# Altium PCB POWER_PCB_v2.PcbDoc (part 2 of 2)
Units mm, origin at the board's own origin, x right, y up, seen from the top; angles counter-clockwise.
Board outline 44.96 x 8.26 mm, 4 copper layers (Top Layer, Layer 1, Layer 2, Bottom Layer), stack 0.797 mm thick; 88 components, 59 nets, 290 pads, 126 vias.
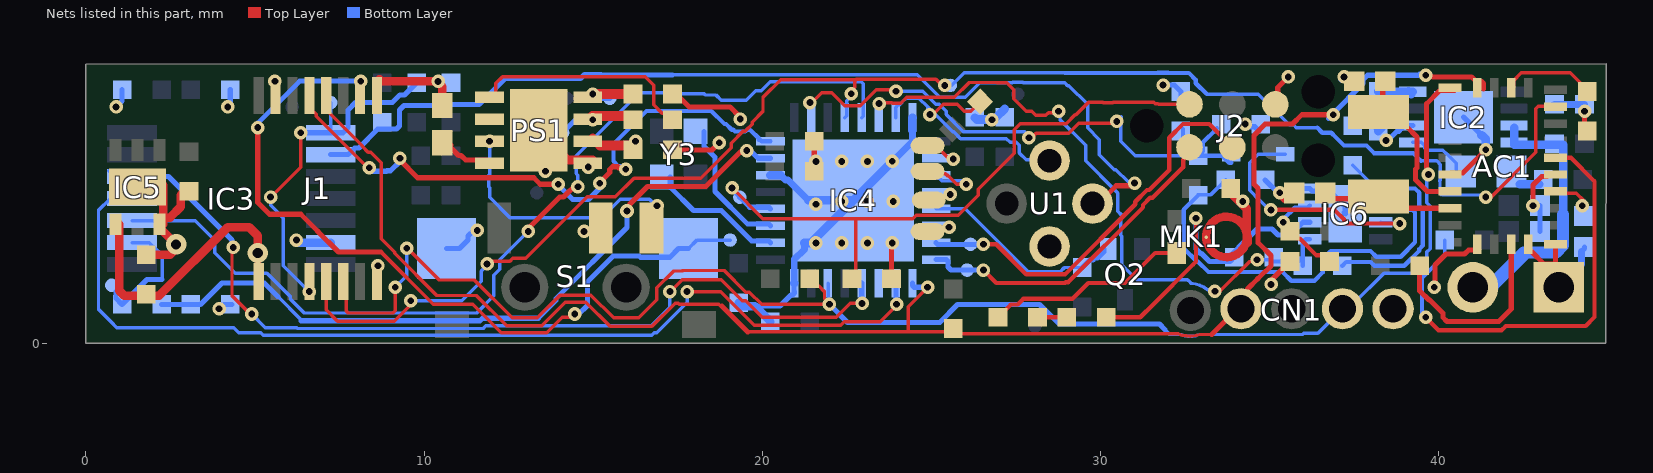
[diagram p4: the nets of this part, all layers, seen from the top]

## Via types
v1: diameter 0.4, hole 0.2, Top Layer to Bottom Layer, tented both sides, 123 vias
v2: diameter 0.6, hole 0.3, Top Layer to Bottom Layer, tented both sides, 2 vias
v3: diameter 0.35, hole 0.35, Top Layer to Bottom Layer, 1 vias

## Nets (pads, with @x,y where several pads share a name; then routed paths per layer and width w, separated by ;. In a path a pad name is that pad's centre, name@x,y a point inside that pad or via, vN(x,y) a via of type N, cw(c..) or ccw(c..) an arc to the next point about the centre after c; other vN are vias at no path point) (continued)
GND: AC1.2 AC1.5 AC1.6 AC1.10 AC1.25 C1.2 C2.2 C3.2 C6.2 C7.2 C9.1 C10.2 C12.1 C13.2 C14.2 C16.2 C17.2 C18.2 C19.2 C20.2 C21.1 C22.2 C23.2 C24.1 C25.1 C26.2 C27.2 C30.2 CN1.5 D1.2 IC2.6 IC2.9 IC3.6 IC4.6 IC4.16 IC4.32 IC4.33 IC5.3 IC5.7 IC6.4 IC6.9 J1.1 J1.2 J2.6 MK1.3 P1.1 PS1.5 PS1.9 R3.1 R5.1 R10.2 R13.1 R15.1 R19.2 R22.2 R23.2 S1.2 U1.1 | length 57
  Top Layer w0.152: J1.2@8.608,1.822 8.608,2.258 v1(8.636,2.286) ; C2.2@17.348,5.715 18.517,5.715 v1(18.729,5.927) v1@18.729,6.068 ; C1.2@17.348,7.366 17.459,7.366 17.838,6.987 19.048,6.987 19.348,6.687 v1(19.348,6.624) ; C25.1@21.539,5.969 21.539,5.464 21.59,5.413 v1(21.59,5.374) ; C22.2@23.825,1.905 23.825,2.944 v1(23.844,2.963) ; v1@35.08,1.763 35.08,1.882 R22.2@35.611,2.413 ; J2.6@35.179,7.059 35.249,7.129 35.249,7.563 v1(35.56,7.874) ; v1(35.306,4.445) 35.306,4.366 35.451,4.221 35.521,4.221 35.735,4.435 C19.2@35.735,4.445 ; v1(37.211,7.874) 37.386,7.874 C20.2@37.513,7.747 ; v1(39.878,1.651) 39.899,1.672 39.899,2.307 40.224,2.632 40.776,2.632 40.896,2.752 41.107,2.752 41.156,2.801 AC1.2@41.156,2.923 ; AC1.25@40.344,4.986 40.393,5.035 40.722,5.035 v1(41.402,5.715) ; AC1.5@42.656,2.923 42.656,2.76 42.705,2.712 42.754,2.712 43.133,2.333 43.469,2.333 AC1.6@43.469,2.923 ; v1(42.799,4.064) 42.799,4.673 43.055,4.929 43.208,4.929 43.208,4.937 43.257,4.986 AC1.10@43.469,4.986 ; v1(44.323,6.858) 44.323,6.35 R10.2@44.399,6.274
  Top Layer w0.254: IC5.7@1.636,4.615 1.771,4.75 2.21,4.75 2.286,4.674 IC5.3@2.286,3.665 ; C3.2@1.778,2.616 2.489,2.616 2.667,2.794 v2(2.667,2.921) 2.271,3.317 2.222,3.317 IC5.3@2.222,3.515 ; IC5.3@2.286,3.515 IC5.3@2.286,3.665 ; C14.2@2.921,4.496 2.803,4.378 2.803,4.032 2.484,3.713 2.334,3.713 IC5.3@2.286,3.665 ; J1.1@8.608,7.322 8.608,7.722 8.682,7.796 8.685,7.796 8.734,7.747 10.414,7.747 10.414,7.711 10.541,7.584 R3.1@10.541,7.027 ; PS1.9@13.536,6.391 PS1.9@13.536,6.139 ; v1(13.589,5.08) 13.536,5.133 PS1.9@13.536,6.139 ; PS1.5@14.838,5.319 14.859,5.298 v1(14.859,5.207) ; PS1.5@14.986,5.416 14.259,5.416 PS1.9@13.536,6.139 ; C27.2@33.858,4.445 v1@34.164,4.139 ; v1(34.216,4.191) v1@34.164,4.139 ; 34.354,3.151 34.333,3.171 34.333,3.97 v1@34.164,4.139 ; 34.355,2.966 34.355,3.151 ; v1(35.052,1.735) v1@35.08,1.763
  Bottom Layer w0.152: v1(0.889,6.985) 1.067,7.163 C10.2@1.067,7.493 ; v1(3.937,1.016) 4.064,1.143 C13.2@4.267,1.143 C13.2@4.318,1.143 ; v1(4.191,6.985) 4.267,7.061 C9.1@4.267,7.493 ; D1.2@10.668,2.794 11.049,2.794 11.303,3.048 11.303,3.167 11.467,3.331 v1(11.576,3.331) ; 19.785,1.094 20.525,1.094 20.851,1.42 20.897,1.42 20.955,1.478 20.955,1.524 20.946,1.533 IC4.32@20.946,1.769 ; v1(31.857,7.633) 32.186,7.633 32.385,7.434 C30.2@32.385,7.318 ; v1@34.41,6.398 34.573,6.398 R19.2@34.62,6.35 ; R23.2@34.874,4.826 35.255,4.445 v1(35.306,4.445) 35.433,4.445 35.56,4.572 IC6.4@36.195,4.572 36.269,4.498 36.569,4.498 36.606,4.461 36.821,4.461 37.245,4.038 IC6.9@37.245,3.822 IC6.9@37.211,3.856 ; v1@37.125,7.788 v1(37.211,7.874) ; R15.1@37.465,6.426 38.075,6.426 R5.1@38.227,6.274 ; v1(38.453,5.993) 38.482,6.021 38.53,6.021 38.665,6.156 38.665,6.158 38.769,6.262 38.83,6.262 38.919,6.351 38.919,6.36 38.993,6.434 IC2.6@39.243,6.434 ; IC2.9@40.743,6.684 IC2.9@41.275,6.152 ; C17.2@43.005,3.302 C16.2@43.005,4.064 ; P1.1@43.561,1.651 P1.1@44.235,2.325 ; C18.2@44.235,2.706 44.323,2.794 C18.2@44.323,2.842 ; v1(44.323,6.858) C6.2@44.323,7.061
  Bottom Layer w0.203: IC4.6@20.542,4.969 20.688,4.823 20.766,4.823 IC4.33@21.369,4.219 ; IC4.32@20.948,1.771 20.948,2.471 21.249,2.772 IC4.33@21.249,2.961 ; IC4.33@23.848,5.371 24.442,5.965 IC4.16@24.442,6.294 ; C7.2@43.434,7.061 C6.2@44.323,7.061 ; P1.1@44.235,2.325 C18.2@44.235,2.706
  Bottom Layer w0.254: v1(6.223,3.048) 6.298,2.973 IC3.6@7.239,2.973 ; v1@14.853,5.135 14.859,5.14 v1(14.859,5.207) ; C21.1@19.304,1.194 19.404,1.094 19.785,1.094 R13.1@20.244,0.635 ; IC4.6@20.246,4.969 IC4.6@20.542,4.969 ; IC4.32@20.946,1.769 IC4.32@20.948,1.771 ; IC4.33@21.249,2.961 v1(21.59,2.961) ; IC4.33@21.369,4.219 21.59,4.219 22.352,4.219 IC4.33@22.696,4.219 ; IC4.33@21.514,3.037 IC4.33@22.696,4.219 ; IC4.33@23.848,5.371 IC4.33@22.696,4.219 ; IC4.16@24.442,6.294 24.444,6.297 24.444,6.667 IC4.16@24.446,6.669 ; C23.2@26.289,6.669 26.345,6.613 26.788,6.613 v1(26.797,6.604) ; v1@26.797,6.669 26.913,6.669 C24.1@27.178,6.934 ; R5.1@38.227,6.274 R5.1@38.319,6.366 ; IC2.9@41.275,6.152 41.286,6.152 41.402,6.036 v1(41.402,5.715)
  other v1: 22.352,2.961 23.114,2.961 14.732,3.302 21.59,4.104 22.352,4.191 23.114,4.191 23.876,4.191 22.352,5.374 23.114,5.374 23.844,5.376 34.29,6.477 10.414,7.738
I2C1_SCL: AC1.19 CN1.2 IC4.25 J1.7 R11.1 | length 48.5
  Top Layer w0.102: J1.7@7.108,7.322 7.108,6.906 8.172,5.842 8.172,5.817 8.341,5.649 8.42,5.649 8.731,5.338 8.731,5.237 8.731,3.08 9.128,2.683 9.128,2.653 10.373,1.408 11.548,1.408 12.443,0.513 13.477,0.513 14.176,1.213 14.78,1.213 15.499,0.494 16.741,0.494 17.431,1.183 17.515,1.183 17.544,1.154 18.712,1.154 18.771,1.095 18.807,1.095 ; 19.572,0.33 24.32,0.33 ; v1(24.892,1.651) 24.32,1.079 24.32,0.33 ; 33.298,0.254 32.934,0.254 cw(c32.663,0.966) 32.663,0.204 cw(c32.663,1.21) 32.305,0.27 25.816,0.27 R11.1@25.654,0.432 25.552,0.33 24.32,0.33
  Top Layer w0.152: 18.807,1.095 19.572,0.33 ; 33.298,0.254 CN1.2@34.187,1.143 ; 34.355,1.6 34.66,1.905 34.868,2.113 34.879,2.113 35.049,2.282 35.049,2.588 34.67,2.966 34.67,4.573 34.544,4.699 34.544,6.14 34.881,6.477 35.687,6.477 35.962,6.752 v1(36.888,6.752) ; v1(39.624,7.921) 39.624,7.934 39.691,8.001 39.822,7.87 40.985,7.87 41.095,7.76 41.107,7.76 41.124,7.744 41.124,7.731 41.286,7.731 41.335,7.682 41.335,7.52
  Bottom Layer w0.152: IC4.25@24.446,1.769 24.446,1.7 24.495,1.651 v1(24.892,1.651) ; v1@36.751,6.652 36.87,6.771 37.774,7.675 37.774,7.791 37.905,7.921 39.411,7.921 39.443,7.954 39.592,7.954 v1(39.624,7.921)
I2C1_SDA: AC1.20 CN1.4 IC4.30 J1.6 R12.1 | length 46.1
  Top Layer w0.102: J1.6@7.608,1.822 7.699,1.731 7.699,0.949 7.759,0.889 9.072,0.889 9.143,0.961 v1(9.144,1.651) ; v1@9.491,2.755 9.544,2.755 9.62,2.679 9.64,2.679 10.454,1.865 11.486,1.865 12.604,0.748 13.352,0.748 14.02,1.416 14.936,1.416 15.604,0.748 16.352,0.748 16.881,1.277 16.881,1.633 17.38,2.131 17.636,2.131 17.653,2.148 18.872,2.148 19.518,1.502 19.623,1.502 19.982,1.143 21.989,1.143 v1(21.991,1.145) 21.991,1.177 21.844,1.324 21.844,1.524 21.687,1.681 21.636,1.681 R12.1@21.412,1.905
  Top Layer w0.152: 39.654,5.199 39.654,7.082 40.044,7.471 AC1.20@40.474,7.471
  Bottom Layer w0.102: v1(9.144,1.651) 9.491,1.998 v1(9.491,2.806) ; IC4.30@21.946,1.769 21.959,1.757 21.959,1.178 v1(21.991,1.145) v1@22.02,1.116 ; 31.917,0.396 32.059,0.254 32.392,0.254 ccw(c32.663,0.966) 32.934,0.254 34.884,0.254 35.347,0.254 ; 35.347,0.254 35.979,0.254 36.017,0.292 36.439,0.292 CN1.4@37.163,1.016 ; CN1.4@37.187,1.143 37.465,1.143 38.392,2.07 39.281,2.07 39.654,2.443 39.654,2.695 39.755,2.796 39.755,4.047 39.654,4.148 39.654,4.936 v1(39.705,4.986)
  Bottom Layer w0.152: v1@22.02,1.116 22.524,0.612 25.25,0.612 25.781,1.143 28.205,1.143 28.785,0.563 31.75,0.563 31.917,0.396 ; CN1.4@37.187,1.016 CN1.4@37.187,1.143
IMU_CLK_IN: AC1.27 C19.1 Y2.1 | length 4
  Top Layer w0.102: Y2.1@38.156,4.267 Y2.1@38.227,4.338
  Top Layer w0.152: C19.1@36.663,4.267 Y2.1@38.156,4.267 ; Y2.1@38.227,4.338 38.579,3.986 AC1.27@40.344,3.986 ; Y2.1@38.608,4.23 Y2.1@38.702,4.23
IMU_CLK_OUT: AC1.26 C20.1 Y2.2 | length 4.8
  Top Layer w0.152: C20.1@38.433,7.747 38.433,7.737 38.321,7.625 38.354,7.592 38.354,6.965 Y2.2@38.227,6.838 38.651,6.414 39.052,6.414 39.37,6.096 39.37,5.186 39.327,5.143 39.327,4.83 39.671,4.486 AC1.26@40.242,4.486
IMU_INT: AC1.14 IC4.12 J1.8 TP10.1 | length 46.5
  Top Layer w0.102: J1.8@7.108,1.822 7.108,0.982 7.44,0.65 9.12,0.65 v1@9.66,1.19 ; v1@11.84,2.42 12.542,2.42 12.625,2.503 13.003,2.503 14.83,4.33 15.66,4.33 16.21,4.88 18.18,4.88 19.082,5.782 19.082,5.912 19.442,6.272 19.494,6.272 19.701,6.478 19.701,6.531 20.024,6.854 20.024,7.267 20.552,7.795 22.733,7.795 22.781,7.795 ; v1(22.635,7.373) 22.665,7.403 22.685,7.403 22.725,7.444 22.725,7.554 22.733,7.562 22.733,7.747 22.781,7.795 ; v1(25.4,7.62) 25.319,7.62 25.141,7.798 22.784,7.798 22.781,7.795 ; v1(41.402,4.318) 41.558,4.318 42.878,5.638 42.878,6.929 42.954,7.006 43.301,7.006 43.395,6.912 AC1.14@43.469,6.986
  Bottom Layer w0.102: v1(9.604,1.251) 11.116,1.251 11.695,1.831 11.695,2.132 11.864,2.301 v1(11.864,2.341) ; IC4.12@22.446,6.669 22.506,6.729 22.506,7.171 22.635,7.299 v1(22.635,7.373) ; TP10.1@25.605,7.62 25.975,7.99 28.959,7.99 ; 33.147,7.366 34.671,7.366 35.585,6.452 35.722,6.452 35.8,6.374 36.418,6.374 ; 39.487,5.39 39.949,5.39 40.057,5.282 40.057,4.819 40.035,4.797 40.049,4.782 40.049,4.439 40.108,4.38 41.526,4.38 41.464,4.318 v1(41.402,4.318)
  Bottom Layer w0.127: 28.959,7.99 31.698,7.99 31.706,7.998 32.008,7.998 32.016,7.99 32.621,7.99 32.825,7.786 32.825,7.688 33.147,7.366 ; 36.418,6.374 36.568,6.223 36.83,6.223 36.973,6.08 ; 36.973,6.08 37.211,5.842 37.875,5.842 38.098,5.619 39.257,5.619 39.487,5.39
LH_DIODE_ARRAY: D1.1 J1.3 TP6.1 | length 23.1
  Top Layer w0.102: v1@5.082,6.273 v1(5.082,6.374) ; 6.856,3.304 6.856,3.31 ; 8.727,2.695 10.267,1.154 11.443,1.154 12.287,0.31 13.633,0.31 14.085,0.762 14.319,0.762 14.418,0.86 v1(14.457,0.86)
  Top Layer w0.152: v1@5.082,6.273 5.082,4.161 5.431,3.812 6.353,3.812 6.856,3.31 ; 6.856,3.304 7.465,2.695 8.727,2.695
  Bottom Layer w0.102: D1.1@17.818,2.794 18.072,3.048 TP6.1@19.05,3.048
  Bottom Layer w0.152: v1(5.082,6.374) 5.082,6.501 5.08,6.503 6.324,7.747 v1(8.128,7.747) ; v1(14.457,0.86) 14.576,0.86 14.83,1.114 14.83,1.817 15.593,2.58 16.363,2.58 16.402,2.54 17.272,2.54 17.526,2.794 D1.1@17.818,2.794
MIC_EN: IC4.21 Q2.1 R8.2 | length 6.1
  Bottom Layer w0.102: IC4.21@25.146,3.969 26.003,3.969 27.867,2.105 28.812,2.105 28.942,2.235 R8.2@29.464,2.235
  Bottom Layer w0.152: R8.2@29.464,2.235 29.688,2.459 29.782,2.459 29.835,2.512 29.918,2.512 30.107,2.701 Q2.1@30.107,2.784
MIC_ENV: C30.1 D2.1 IC4.10 R19.1 R21.1 | length 17
  Top Layer w0.102: v1(21.413,7.113) 21.464,7.113 21.758,7.407 22.057,7.407 22.443,7.021 22.896,7.021 23.368,7.493 23.895,7.493 23.942,7.445 v1(23.959,7.445) ; v1(27.89,6.07) 27.968,6.07 28.099,6.201 29.062,6.201 29.359,6.498 30.428,6.498 v1(30.485,6.555)
  Bottom Layer w0.102: v1(23.959,7.445) 23.963,7.45 24.754,7.45 25.139,7.064 25.234,7.064 25.442,6.856 25.442,6.761 25.951,6.253 26.65,6.253 26.651,6.252 26.943,6.252 26.944,6.253 27.764,6.253 27.89,6.127 v1(27.89,6.07) ; v1(30.485,6.555) 30.619,6.69 30.619,6.581 30.607,6.569 30.607,5.969 31.039,5.537 R21.1@32.893,5.537
  Bottom Layer w0.127: C30.1@32.385,6.398 32.448,6.335 32.448,5.982 R21.1@32.893,5.537 ; R19.1@33.452,6.35 33.03,5.928 33.03,5.674 R21.1@32.893,5.537 ; 33.871,5.334 33.811,5.334 33.684,5.461 33.608,5.537 R21.1@32.893,5.537
MIC_SIG: C29.1 IC4.14 IC6.1 R17.1 | length 18.5
  Top Layer w0.102: v1(23.458,7.085) 23.485,7.112 23.838,7.112 23.857,7.093 24.104,7.093 24.279,7.268 25.68,7.268 26.12,7.708 26.955,7.708 26.957,7.705 27.232,7.705 27.438,7.499 27.438,7.224 27.806,6.857 27.972,6.857 28.094,6.735 28.386,6.735 28.468,6.818 28.728,6.818 v1(28.767,6.857) ; v1(33.39,1.532) 33.536,1.532 34.417,2.413 34.585,2.413 v1(34.637,2.465)
  Bottom Layer w0.102: v1(28.767,6.857) 28.809,6.815 28.809,6.604 29.566,5.848 29.566,5.396 30.435,4.527 30.522,4.439 30.522,3.895 30.628,3.789 30.628,3.704 30.607,3.683 30.607,3.189 30.638,3.158 30.638,2.314 31.083,1.87 32.58,1.87 32.656,1.794 32.682,1.768 cw(c32.603,0.794) 33.191,1.575 33.224,1.575 v1@33.325,1.575 ; v1(34.637,2.465) 35.076,2.465 R17.1@35.128,2.413
  Bottom Layer w0.127: R17.1@35.128,2.413 35.857,2.413 C29.1@35.992,2.548 ; C29.1@35.992,2.286 C29.1@35.992,2.548 ; IC6.1@36.195,3.072 36.078,3.072 35.992,2.985 C29.1@35.992,2.548
MUX_CTRL: PS1.2
MUX_STATUS: PS1.1 R2.2 | length 6.5
  Top Layer w0.102: PS1.1@12.086,7.366 12.125,7.405 12.125,7.68 12.319,7.874 16.545,7.874 16.792,7.627 16.792,7.049 17.038,6.803 17.149,6.803 R2.2@17.348,6.604
MUX_SWITCH: PS1.3 S1.3 | length 8.6
  Top Layer w0.102: v1(11.938,5.969) PS1.3@12.065,5.969
  Top Layer w0.152: S1.3@16.637,3.048 16.728,3.139 S1.3@16.728,3.401 16.728,3.846 16.637,3.937 16.764,4.064 v1(16.891,4.064)
  Bottom Layer w0.102: v1(11.938,5.969) 11.938,4.983 11.914,4.959 11.914,4.625 11.938,4.6 11.938,4.314 12.541,3.711 15.25,3.711 15.798,4.259 16.668,4.259 16.863,4.064 v1(16.891,4.064)
NetAC1_4: AC1.4 R9.1 | length 6
  Top Layer w0.152: R9.1@39.446,2.286 39.446,1.549 39.722,1.273 39.748,1.273 40.132,0.889 40.132,0.762 40.254,0.64 41.788,0.64 42.156,1.008 AC1.4@42.156,2.923
NetAC1_9: AC1.9 C18.1 | length 1.1
  Top Layer w0.102: AC1.9@43.469,4.43 44.084,4.43 44.31,4.204 44.31,4.119 v1(44.255,4.064)
NetAC1_11: AC1.11 R16.1 | length 13.4
  Top Layer w0.127: v1(39.624,0.762) 40.006,0.38 41.869,0.38 41.997,0.508 44.358,0.508 44.62,0.77 44.62,4.783 43.923,5.48 43.474,5.48 AC1.11@43.469,5.486
  Bottom Layer w0.102: 39.912,2.32 40.183,2.591 R16.1@40.183,3.048
  Bottom Layer w0.127: v1(39.624,0.762) 39.513,0.873 39.513,1.921 39.912,2.32
NetAC1_17: AC1.17 R10.1 | length 2.8
  Top Layer w0.102: AC1.17@42.156,7.493 42.23,7.567 42.23,7.767 42.453,7.99 43.902,7.99 R10.1@44.45,7.442
NetC11_2: C11.2 IC3.2 U1.4 | length 28.9
  Top Layer w0.152: U1.4@29.77,4.127 29.943,4.127 30.471,4.655 30.87,4.655 30.948,4.733 v1(31.015,4.733)
  Bottom Layer w0.102: 17.348,7.933 24.588,7.933 25.254,7.268 26.001,7.268 26.434,7.7 27.395,7.7 27.413,7.718 27.705,7.718 27.723,7.7 28.944,7.7 29.03,7.614 29.071,7.614 29.624,7.061 29.624,6.364 29.972,6.016 29.972,5.564 30.408,5.129 30.464,5.129 30.825,4.767 30.98,4.767 v1(31.015,4.733)
  Bottom Layer w0.152: IC3.2@7.239,5.573 7.752,5.573 7.948,5.769 8.071,5.769 8.631,6.329 9.186,6.329 9.275,6.418 9.275,6.897 9.409,7.031 10.585,7.031 10.61,7.057 11.629,7.057 12.402,7.83 14.628,7.83 14.745,7.947 15.227,7.947 15.24,7.933 17.348,7.933
NetC28_1: C28.1 MK1.2 | length 6.1
  Top Layer w0.127: C28.1@26.975,0.762 27.356,1.143 27.559,1.143 27.724,1.308 29.172,1.308 29.642,1.778 30.734,1.778 31.623,2.667 MK1.2@32.258,2.667
NetC28_2: C28.2 R18.2 | length 0.9
  Top Layer w0.127: C28.2@28.143,0.762 R18.2@29.007,0.762
NetC29_2: C29.2 IC6.5 R15.2 | length 6.7
  Bottom Layer w0.102: R15.2@37.465,5.258 37.996,4.727 37.996,4.671 38.095,4.572 IC6.5@38.295,4.572
  Bottom Layer w0.127: C29.2@37.16,2.286 37.271,2.397 37.997,2.397 38.108,2.286 38.989,2.286 39.438,2.735 39.438,2.785 39.539,2.886 39.539,3.957 39.438,4.059 39.438,4.445 39.311,4.572 38.803,4.572 IC6.5@38.295,4.572
NetD2_2: D2.2 IC6.7 | length 7.5
  Top Layer w0.127: v1(35.048,3.937) 35.052,3.941 36.924,3.941 37.219,3.645 37.219,3.63 37.313,3.536 v1(38.858,3.536)
  Bottom Layer w0.102: v1(35.048,3.937) 35.048,3.868 34.98,3.936 34.98,3.962 34.717,4.225 34.71,4.225 34.417,4.518 34.417,5.334 34.671,5.588 D2.2@35.471,5.588 ; IC6.7@38.295,3.572 38.303,3.564 38.854,3.564 38.858,3.56 v1(38.858,3.536)
NetIC2_5: IC2.5 LED1.1 | length 1.9
  Bottom Layer w0.102: IC2.5@39.243,5.934 39.493,5.934 39.592,5.835 39.592,5.766 39.652,5.706 40.132,5.706 40.219,5.619 40.228,5.619 40.525,5.322 LED1.1@40.525,4.953
NetIC2_8: IC2.8 R5.2 | length 1.1
  Bottom Layer w0.254: R5.2@38.227,7.442 38.235,7.434 IC2.8@39.124,7.434 ; IC2.8@39.116,7.442 IC2.8@39.124,7.434 ; IC2.8@39.192,7.366 IC2.8@39.124,7.434 ; IC2.8@39.243,7.434 IC2.8@39.124,7.434
NetIC3_9: IC3.9 R6.1 TP14.1 | length 3.7
  Bottom Layer w0.102: IC3.9@1.363,2.973 1.876,2.973 2.148,2.7 2.164,2.7 2.253,2.611 2.253,1.882
  Bottom Layer w0.152: 0.884,1.529 0.884,1.326 R6.1@1.067,1.143 1.806,1.882 2.253,1.882
NetIC4_18: IC4.18 TP25.1 | length 0.9
  Top Layer w0.102: TP25.1@24.892,5.842 25.143,5.842 25.542,5.443 v1(25.654,5.443)
NetIC4_19: IC4.19 TP24.1 | length 2.3
  Top Layer w0.102: TP24.1@24.892,5.08 24.968,5.004 25.423,5.004 25.473,4.953 25.489,4.969 25.759,4.699 v1(26.035,4.699)
  Bottom Layer w0.102: IC4.19@25.146,4.969 25.322,4.793 25.504,4.793 25.508,4.797 25.937,4.797 v1(26.035,4.699)
NetIC4_20: IC4.20 TP22.1 | length 0.8
  Top Layer w0.102: TP22.1@24.93,4.229 25.006,4.305 25.387,4.305 25.43,4.348 25.565,4.348 25.612,4.396 v1(25.564,4.396)
NetIC4_22: IC4.22 TP20.1 | length 0.7
  Top Layer w0.102: TP20.1@24.892,3.302 25.019,3.429 v1(25.527,3.429)
NetIC6_2: IC6.2 R17.2 R18.1 | length 9.8
  Top Layer w0.127: R18.1@30.175,0.762 30.175,0.712 30.225,0.762 31.184,0.762 31.572,1.15 32.731,2.309 32.831,2.409 v1(32.831,3.69)
  Bottom Layer w0.152: v1(32.831,3.69) 32.831,2.784 32.967,2.647 32.993,2.647 33.228,2.413 33.833,2.413 R17.2@33.96,2.54 ; R17.2@33.881,2.603 34.088,2.81 34.088,2.832 34.632,3.376 35.079,3.376 35.257,3.198 35.57,3.198 35.667,3.296 35.771,3.4 35.823,3.4 35.995,3.572 IC6.2@36.195,3.572
NetIC6_3: IC6.3 R20.2 R22.1 | length 4.2
  Top Layer w0.127: v1(35.413,3.576) 35.428,3.576 35.524,3.48 R20.2@35.594,3.48 ; R20.2@35.611,3.302 R20.2@35.822,3.09 ; R20.2@35.748,3.241 35.748,3.165 R20.2@35.822,3.09 ; R22.1@36.779,2.413 R22.1@36.576,2.413 ; R20.2@35.822,3.09 35.899,3.09 ; R20.2@35.822,3.09 35.899,3.09 ; 35.899,3.09 36.395,2.594 ; 35.899,3.09 36.395,2.594 ; 36.395,2.594 R22.1@36.568,2.594 ; 36.395,2.594 R22.1@36.568,2.594 ; R22.1@36.568,2.594 R22.1@36.576,2.586 ; R22.1@36.568,2.594 R22.1@36.576,2.586 ; R22.1@36.576,2.413 R22.1@36.576,2.586 ; R22.1@36.576,2.413 R22.1@36.576,2.586
  Bottom Layer w0.127: v1(35.413,3.576) 35.413,3.663 35.433,3.683 35.751,4.001 36.124,4.001 IC6.3@36.195,4.072
NetIC6_6: IC6.6 R21.2 R23.1 | length 12.8
  Bottom Layer w0.102: R21.2@32.893,4.369 32.905,4.381 33.261,4.381 R23.1@33.706,4.826
  Bottom Layer w0.127: R21.2@32.893,4.369 32.465,3.941 32.465,2.808 32.867,2.406 32.893,2.406 33.199,2.1 35.394,2.1 35.648,1.846 35.814,1.846 36.335,1.846 36.576,2.087 36.576,2.485 36.817,2.726 37.992,2.726 38.162,2.556 38.886,2.556 39.311,2.981 39.311,3.863 39.237,3.937 38.63,3.937 38.495,4.072 IC6.6@38.295,4.072
NetLED1_2: LED1.2 R4.1 | length 0.6
  Bottom Layer w0.254: LED1.2@42.406,4.699 42.711,4.699 R4.1@42.977,4.699
NetPS1_4: PS1.4 R3.2 | length 1.3
  Top Layer w0.152: R3.2@10.795,5.851 10.795,5.776 11.019,5.552 11.094,5.552 11.23,5.416 11.859,5.416 PS1.4@11.862,5.413
NRST: C22.1 IC4.4 J2.2 TP23.1 | length 19.1
  Top Layer w0.102: v1(19.11,4.588) 20.015,3.683 22.718,3.683 ; C22.1@22.657,1.905 22.762,2.01 22.762,3.639 22.718,3.683 ; J2.2@32.639,7.059 31.722,7.059 31.704,7.077 31.627,7.077 31.581,7.123 30.382,7.123 30.372,7.113 30.08,7.113 30.07,7.123 29.653,7.123 29.282,6.752 29.254,6.752 28.988,6.487 27.634,6.487 27.46,6.313 27.46,5.616 26.391,4.547 26.391,4.373 25.799,3.781 24.552,3.781 24.454,3.683 22.762,3.683 22.718,3.683
  Bottom Layer w0.152: v1(19.11,4.588) 19.11,4.565 19.338,4.337 TP23.1@19.338,4.314 19.634,4.018 20.197,4.018 IC4.4@20.246,3.969
RCC_OSC_IN: IC4.2 Y3.3 | length 3.9
  Bottom Layer w0.152: Y3.3@17.28,4.913 17.28,4.611 17.968,3.923 18.788,3.923 19.692,3.018 20.197,3.018 IC4.2@20.246,2.969
RCC_OSC_OUT: IC4.3 Y3.1 | length 4
  Bottom Layer w0.152: Y3.1@18.28,6.263 18.28,5.823 18.605,5.498 18.605,4.488 19.574,3.518 20.197,3.518 IC4.3@20.246,3.469
SPI3_MISO: IC4.27
SPI3_MOSI: IC3.12 IC4.28 | length 27.3
  Top Layer w0.102: v1(4.353,2.829) 4.318,2.794 4.318,1.397 4.855,0.86 v1(4.901,0.86) ; v1(17.272,1.524) 17.281,1.524 17.634,1.877 18.783,1.877 19.413,1.248 19.518,1.248 20.004,0.762 22.196,0.762 22.608,1.174 v1(22.956,1.174)
  Bottom Layer w0.102: IC3.12@0.676,5.097 0.85,4.923 IC3.12@1.363,4.923 ; v1(4.901,0.86) 5.304,0.457 6.238,0.457 6.264,0.432 11.746,0.432 11.823,0.508 16.721,0.508 17.272,1.059 v1(17.272,1.524)
  Bottom Layer w0.152: IC3.12@1.363,4.923 2.443,4.923 4.318,3.048 4.318,2.865 v1(4.353,2.829) ; IC4.28@22.946,1.769 22.946,1.184 v1(22.956,1.174)
SPI3_SCLK: IC3.11 IC4.26 | length 30
  Top Layer w0.102: v1(17.78,1.524) 18.777,1.524 19.768,0.533 22.327,0.533 22.428,0.635 23.495,0.635 23.975,1.115 v1(23.975,1.149)
  Bottom Layer w0.102: IC3.11@1.315,4.273 0.717,4.273 0.37,3.926 0.37,1.002 0.75,0.623 0.916,0.457 4.369,0.457 4.516,0.31 5.163,0.31 5.245,0.229 16.729,0.229 16.81,0.31 16.882,0.31 17.78,1.208 v1(17.78,1.524)
  Bottom Layer w0.152: IC4.26@23.946,1.769 23.96,1.755 23.96,1.163 v1(23.975,1.149)
SYS_SWCLK_ALT: IC4.24 J2.1 TP19.1 | length 9.8
  Top Layer w0.127: v1(26.543,2.159) 26.924,1.778 28.956,1.778 28.981,1.803 29.051,1.803 31.261,4.014 31.261,4.085 31.475,4.299 31.546,4.299 32.452,5.205 32.452,5.423 32.639,5.61 J2.1@32.639,5.789
  Bottom Layer w0.152: IC4.24@25.146,2.469 25.445,2.469 25.494,2.42 25.494,2.248 25.583,2.159 TP19.1@26.063,2.159 v1(26.543,2.159)
SYS_SWDIO_ALT: IC4.23 J2.3 TP21.1 | length 11.9
  Top Layer w0.127: v1(26.543,2.921) 26.924,2.921 27.813,2.032 28.956,2.032 31.033,4.109 31.033,4.179 31.381,4.527 31.451,4.527 32.042,5.118 32.042,6.072 32.447,6.477 33.221,6.477 J2.3@33.909,5.789
  Bottom Layer w0.152: IC4.23@25.146,2.969 25.194,2.921 TP21.1@26.162,2.921 v1(26.543,2.921)
TP_AFE_OUT: C13.1 IC4.7 R6.2 | length 21.3
  Top Layer w0.152: v1(16.002,3.907) 16.002,3.977 16.073,4.048 16.073,4.097 16.606,4.63 18.33,4.63 19.345,5.645 19.497,5.645 v1(19.545,5.693)
  Bottom Layer w0.102: 5.672,1.382 6.359,0.696 6.359,0.66
  Bottom Layer w0.152: R6.2@2.235,1.143 C13.1@3.099,1.143 3.387,1.143 4.024,1.78 5.274,1.78 5.672,1.382 ; 6.359,0.66 11.652,0.66 11.728,0.737 13.377,0.737 13.907,1.266 13.907,1.324 16.002,3.419 v1(16.002,3.907) ; v1@19.592,5.749 19.873,5.469 IC4.7@20.246,5.469
TP_NOSE: C8.2 IC3.1 J1.10 TP9.1 | length 10.8
  Top Layer w0.102: v1(5.461,4.318) 6.35,5.207 v1(6.35,6.223)
  Bottom Layer w0.102: v1(5.461,4.318) 5.461,4.078 5.84,3.7 5.84,2.288 v1(6.604,1.524) ; IC3.1@7.239,6.223 TP9.1@7.239,7.112
  Bottom Layer w0.152: v1(6.35,6.223) IC3.1@7.239,6.223 7.601,6.223 7.749,6.372 7.749,6.888 7.974,7.112 9.059,7.112 9.283,7.336 9.419,7.336 C8.2@9.779,7.696
TP_NOSE_THERM: IC4.8 J1.9 | length 18.2
  Top Layer w0.102: J1.9@6.608,6.922 6.707,6.823 6.746,6.823 6.806,6.763 6.806,6.709 8.33,5.184 v1(8.379,5.184)
  Top Layer w0.152: v1(9.287,5.467) 9.287,5.411 9.806,4.891 13.242,4.891 13.435,4.699 v1(13.97,4.699) ; v1(15.199,4.729) 15.185,4.743 15.492,5.049 15.492,5.138 15.585,5.231 15.601,5.215 15.727,5.215 15.757,5.186 15.917,5.186 v1(15.965,5.138)
  Bottom Layer w0.127: v1(15.965,5.138) 15.891,5.138 15.803,5.227 15.755,5.227 15.602,5.379 15.602,5.888 16.581,6.867 18.496,6.867 18.886,6.477 18.931,6.477 19.1,6.308 19.148,6.308 19.197,6.259 19.499,6.259 19.544,6.304 19.649,6.304 19.897,6.056 19.897,6.018 19.935,6.018 19.984,5.969 IC4.8@20.246,5.969
  Bottom Layer w0.152: v1(8.379,5.184) 8.379,5.192 8.334,5.237 8.31,5.26 8.31,5.189 8.414,5.084 8.892,5.084 8.903,5.096 9.008,5.096 9.287,5.375 v1(9.287,5.467) ; v1(13.97,4.699) 13.97,4.673 14.395,4.248 14.862,4.248 15.199,4.585 v1(15.199,4.729)
TP_SS: IC3.10 IC4.13 | length 28.4
  Top Layer w0.152: v1(13.081,3.302) 13.081,3.391 14.01,4.32 14.127,4.32 14.551,4.745 v1(14.551,4.626)
  Bottom Layer w0.102: IC3.10@1.363,3.623 3.227,3.623 3.81,3.039 3.81,2.667 4.417,2.06 5.353,2.06 6.048,1.365 6.048,1.294 6.453,0.889 11.557,0.889 12.065,1.397 12.065,2.005 12.24,2.18 12.24,2.461 v1(13.081,3.302) ; v1(14.551,4.626) 14.551,4.97 14.506,5.015 14.506,5.545 16.36,7.4 17.51,7.4 17.535,7.375 18.288,7.375 18.324,7.338 18.633,7.338 18.792,7.18 19.529,7.18 19.814,7.465 19.976,7.465 20.237,7.726 22.927,7.726 22.987,7.666 22.987,6.71 IC4.13@22.946,6.669
TP_THERMISTOR: IC4.15 R14.2 U1.3 | length 8
  Top Layer w0.102: v1(24.961,6.76) 25.003,6.802 25.09,6.802 25.35,7.062 25.769,7.062 25.972,6.859 26.163,6.859 R14.2@26.448,7.144
  Bottom Layer w0.102: IC4.15@23.946,6.669 23.946,6.969 24.02,7.043 24.07,7.043 24.13,7.103 24.13,7.119 24.258,7.246 24.634,7.246 24.894,6.987 ; v1(24.961,6.76) 24.953,6.76 24.894,6.82 24.894,6.987 ; U1.3@28.5,5.397 28.477,5.42 27.807,5.42 27.605,5.622 27.605,5.85 27.516,5.939 27.335,5.939 27.224,6.05 27.028,6.05 27.027,6.048 26.567,6.048 26.566,6.05 25.867,6.05 25.67,6.246 25.634,6.246 25.041,6.84 24.894,6.987
VBAT_1: C1.1 J1.13 PS1.8 TP4.1 | length 1.9
  Top Layer w0.152: PS1.8@14.838,7.269 14.935,7.366 v1(14.986,7.366)
  Top Layer w0.305: v1(14.986,7.366) C1.1@16.18,7.366
  Bottom Layer w0.152: v1(14.986,7.366) 15.022,7.366 15.149,7.239 TP4.1@15.494,7.239
  other v1: 5.588,7.747
VBAT_2: C2.1 C7.1 IC2.3 IC2.4 P1.2 PS1.6 | length 9.6
  Top Layer w0.254: PS1.6@14.986,6.066 PS1.6@15.21,5.842 ; C2.1@16.18,5.842 16.256,5.918 v1(16.256,5.969)
  Top Layer w0.305: PS1.6@15.21,5.842 C2.1@16.18,5.842
  Bottom Layer w0.203: C7.1@43.407,5.866 C7.1@43.434,5.893
  Bottom Layer w0.254: IC2.3@42.243,6.366 IC2.4@42.243,5.934 42.243,5.866 C7.1@43.407,5.866 ; C7.1@43.434,5.866 43.688,5.866 43.688,3.81
  Bottom Layer w0.356: 42.532,2.654 42.558,2.68 43.48,2.68 43.688,2.889 43.688,3.81
  Bottom Layer w0.406: P1.2@41.529,1.651 42.532,2.654
  Bottom Layer w0.508: P1.2@41.021,1.651 P1.2@41.529,1.651
VBAT_MUX: C3.1 IC5.1 J1.16 PS1.7 R2.1 TP7.1 | length 10.9
  Top Layer w0.152: v2(5.08,2.667) 5.08,2.413 5.094,2.399 5.094,1.836 J1.16@5.108,1.822 ; PS1.7@14.838,6.619 14.844,6.619 14.859,6.604 v1(14.986,6.604)
  Top Layer w0.254: IC5.1@0.986,3.515 0.986,1.546 1.135,1.397 2.159,1.397 4.191,3.429 4.826,3.429 5.08,3.175 v2(5.08,2.667)
  Top Layer w0.305: PS1.7@14.986,6.716 16.068,6.716 R2.1@16.18,6.604
  Bottom Layer w0.152: TP7.1@14.097,6.223 14.478,6.604 v1(14.986,6.604)
pads on no net: AC1.1 AC1.7 AC1.8 AC1.12 AC1.13 AC1.15 AC1.16 AC1.18 AC1.21 AC1.22 AC1.23 AC1.24 IC2.7 IC3.7 IC3.8 IC4.29 IC5.2 IC5.4 IC5.5 J1.11 J1.14 J1.15 J2.7 J2.8 J2.9 S1.1 S1.4 S1.5 S1.6 S1.7 S1.8 S1.9 Y3.2 Y3.4
copper on no net: | length 1.1
  Top Layer w0.152: 5.108,7.14 5.108,7.322 ; v1(5.588,0.889) 5.608,0.909 5.608,1.822
  other v3: 33.734,3.141

## Polygon pours and split planes (outlines as drawn)
3.3V_PWR on Layer 1 "Layer 1-3.3V_PWR" (solid, pour order 14): 43.307,3.048 43.307,3.937 29.083,3.937 27.646,5.374 18.034,5.374 18.034,4.699 16.891,3.556 10.541,3.556 10.541,0.889 2.54,0.889 2.413,1.016 2.413,2.032 2.286,2.159 2.286,4.699 7.747,4.699 7.747,6.604 4.445,6.604 4.445,8.128 0.127,8.128 0.127,0.127 40.767,0.127 40.767,3.048
5V on Layer 1 "Layer 1-5V 1" (solid, pour order 16): 30.607,4.064 30.607,5.969 43.269,5.969 43.269,4.064
5V on Layer 1 "Layer 1-5V" (solid, pour order 12): 32.258,6.604 32.258,4.94 28.334,4.94 27.686,5.588 17.78,5.588 17.78,4.826 16.891,3.937 10.541,3.937 10.287,3.683 10.287,1.016 2.667,1.016 2.667,2.159 9.652,2.159 9.652,5.207 15.494,5.207 15.494,5.588 16.891,5.588 16.891,6.604
VBAT_2 on Layer 1 "Layer 1-VBAT_2" (solid, pour order 2): 44.831,0.127 40.767,0.127 40.767,2.921 43.434,2.921 43.434,6.731 15.494,6.731 15.494,8.128 44.831,8.128
VBAT_1 on Layer 1 "Layer 1-VBAT_1" (solid, pour order 4): 15.24,8.128 15.24,6.858 4.699,6.858 4.699,8.128
VBAT_2 on Layer 1 "Layer 1-VBAT_2 2" (solid, pour order 18): 43.688,7.493 43.688,6.096 32.512,6.096 32.512,7.493
VBAT_MUX on Layer 1 "Layer 1-VBAT_MUX" (solid, pour order 10): 9.053,4.561 2.54,4.561 2.54,2.286 9.053,2.286
VBAT_MUX on Layer 1 "Layer 1-VBAT_MUX 1" (solid, pour order 8): 15.24,6.604 15.24,5.334 9.442,5.334 9.442,2.286 8.001,2.286 8.001,6.604
VBAT_2 on Layer 1 "Layer 1-VBAT_2 1" (solid, pour order 6): 15.494,6.985 15.494,5.842 16.637,5.842 16.637,6.985
GND on Layer 2 "Layer 2-GND" (solid, pour order 0): 0.127,8.128 0.127,0.127 44.831,0.127 44.831,8.128

## Silkscreen, mask and mechanical layers (free items; w line width, h text height)
Top Overlay:
  lines w0.254: 39.751,0.635 40.513,0.635 ; 40.132,0.254 40.132,1.016 ; 43.942,0.508 44.704,0.508
  text "PWR BOARD v2.1" at 0,0 h0.6 r359.79
  text "03.25.2020" at 19.177,0 h0.6 r359.79
Bottom Overlay:
  lines w0.127: 42.291,0.984 42.291,2.794 43.688,2.794 ; 43.688,2.785 43.688,4.667
  lines w0.254: 39.751,0.635 40.513,0.635 ; 40.132,0.254 40.132,1.016 ; 43.18,0.508 43.942,0.508
Mechanical BS:
  the board outline again, w0.013